# Altium PCB imx6_cpu_board.PcbDoc (part 3 of 9)
Units mil, origin at the board's own origin, x right, y up, seen from the top; angles counter-clockwise.
Board outline 2598.43 x 2362.2 mil, 8 copper layers (Top Layer, GND1, Signal Layer 1, POWER1, POWER2, Signal Layer 2, GND2, Bottom Layer), stack 66.304 mil thick; 354 components, 422 nets, 2180 pads, 1333 vias.
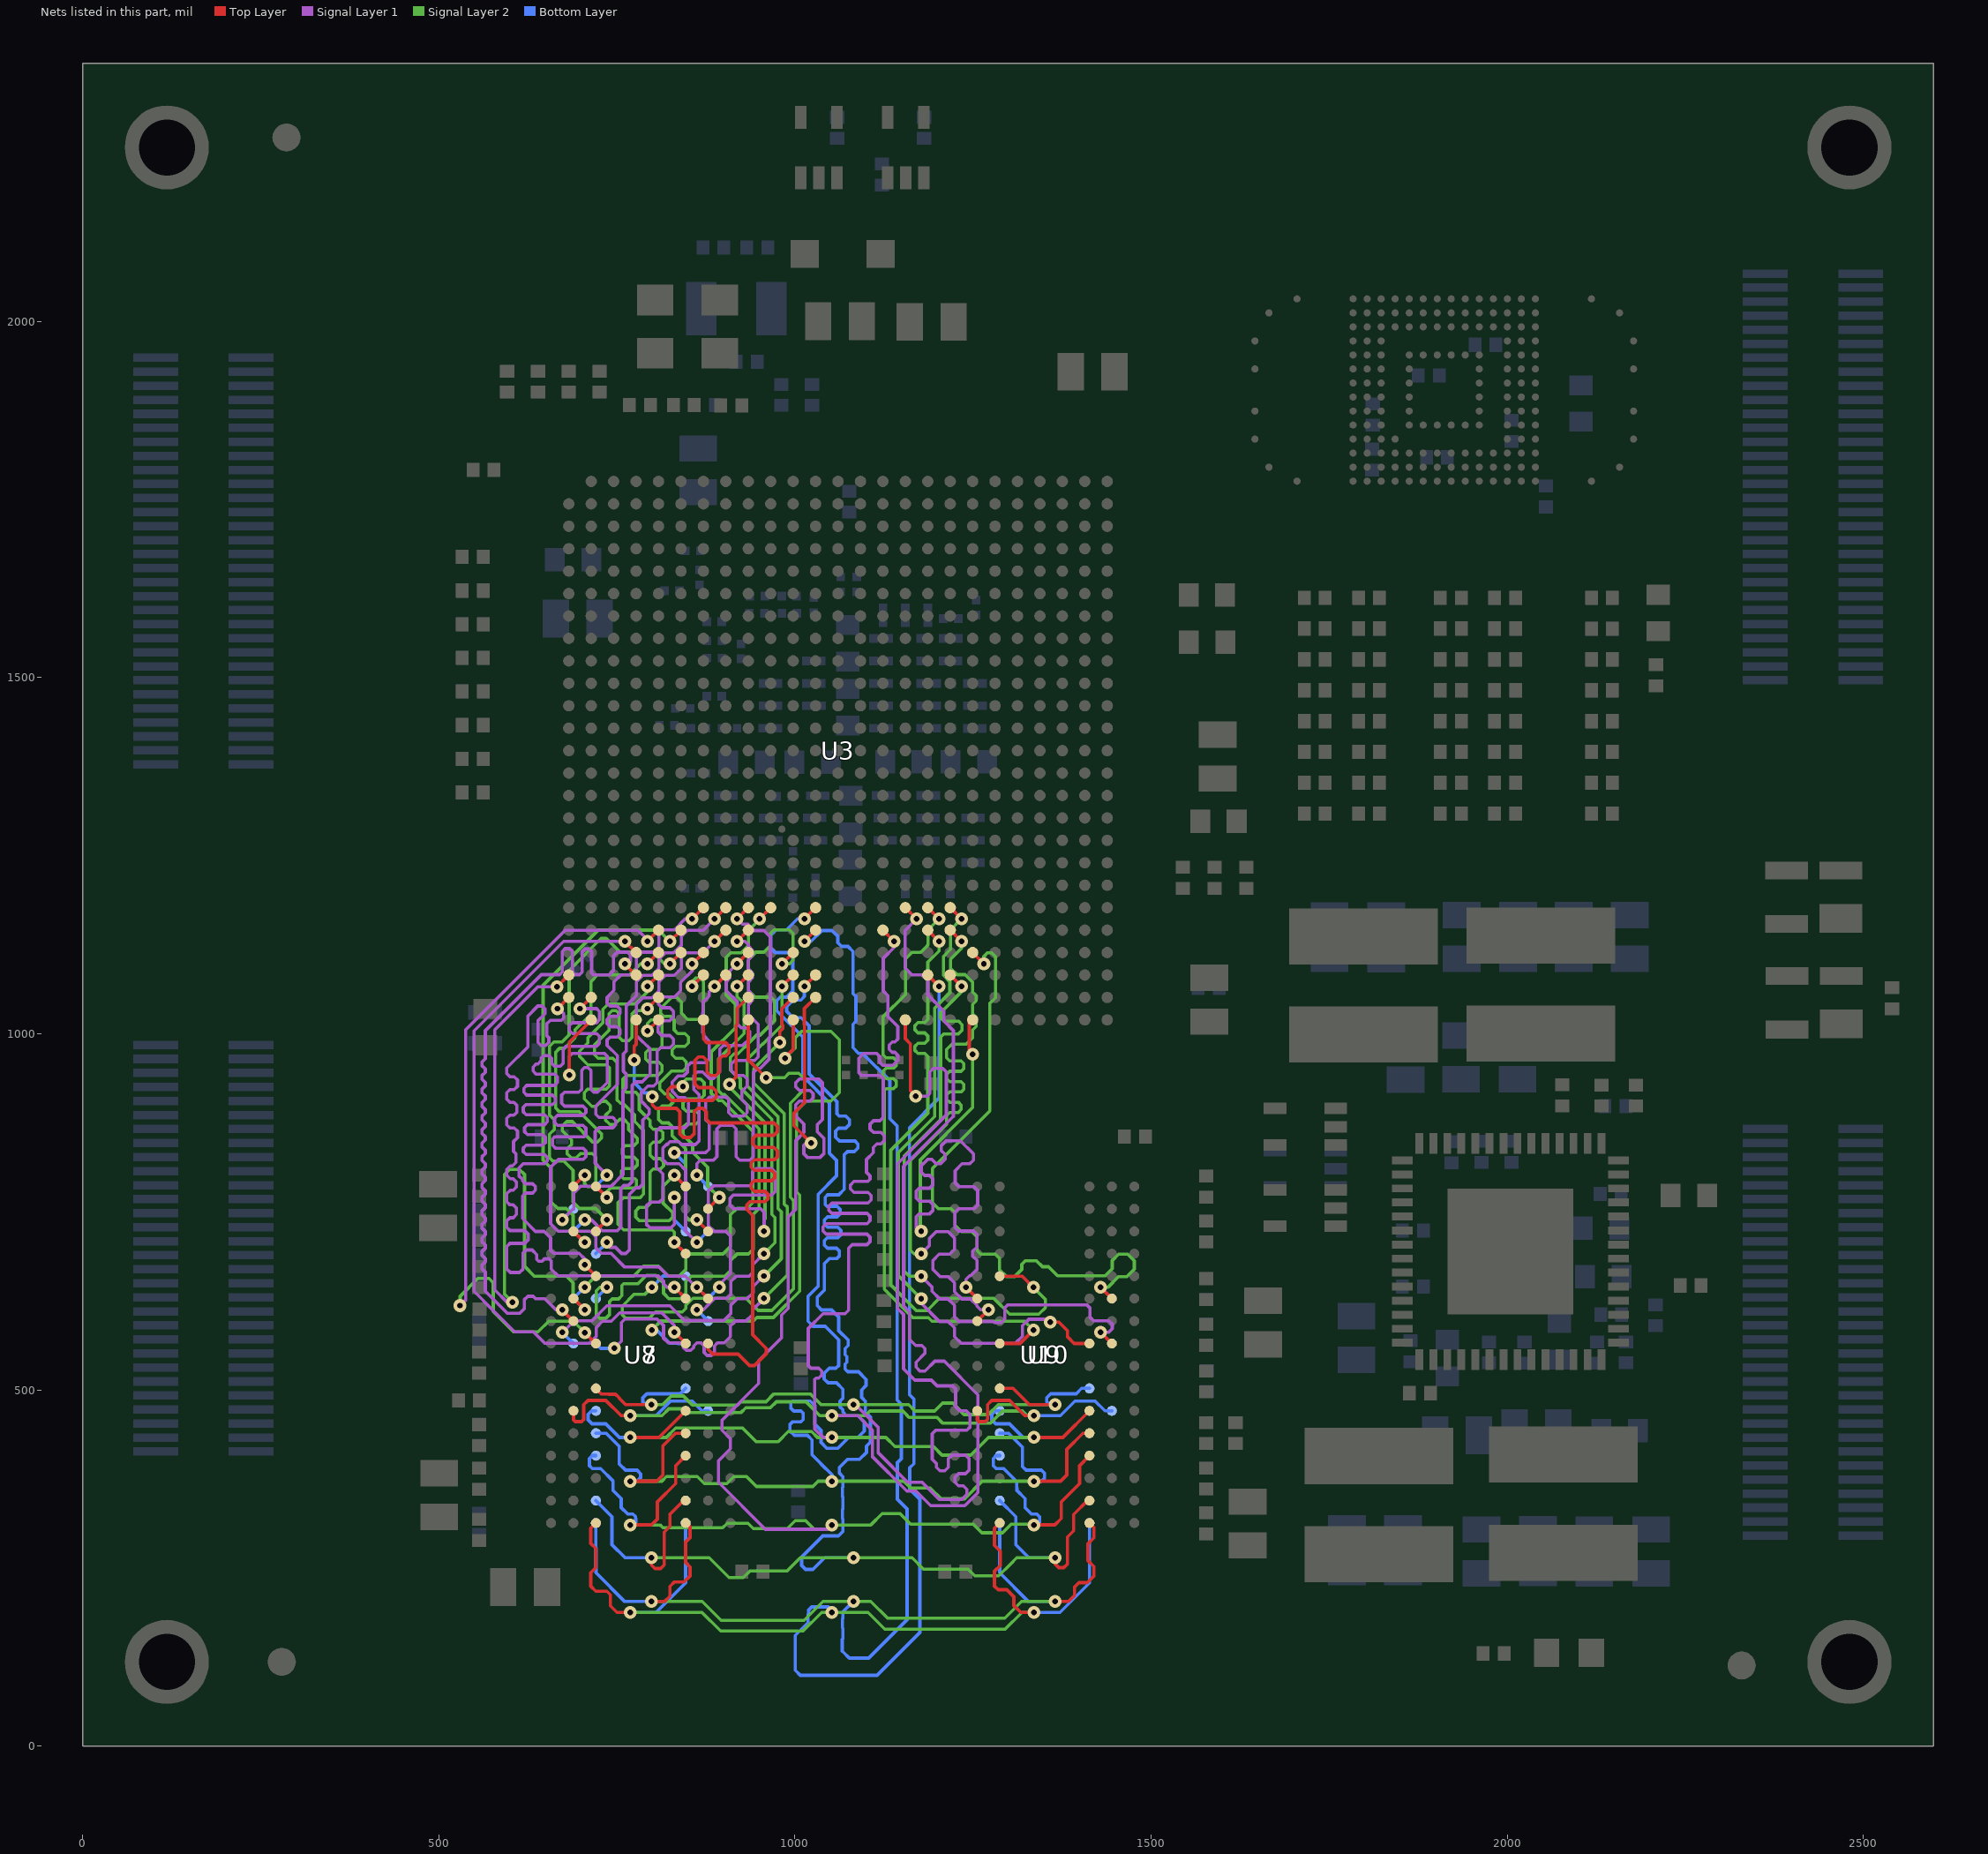
[diagram p9: the nets of this part, all layers, seen from the top]

## Via types
v1: diameter 18, hole 8, Top Layer to Bottom Layer, tented both sides, 768 vias
v2: diameter 20, hole 10, Top Layer to Bottom Layer, tented both sides, 565 vias

## Nets (pads, with @x,y where several pads share a name; then routed paths per layer and width w, separated by ;. In a path a pad name is that pad's centre, name@x,y a point inside that pad or via, vN(x,y) a via of type N, cw(c..) or ccw(c..) an arc to the next point about the centre after c; other vN are vias at no path point) (continued)
DRAM_A10: U3.AA15 U7.L7 U8.L7 U9.L7 U10.L7 | length 2253.2
  Top Layer w4.7: v1(768.45,433.19) 809.03,433.19 U8.L7@846.43,470.61 ; U3.AA15@1123.37,1145.37 v1(1139.12,1129.62) ; v1(1335.38,433.19) 1375.96,433.19 U10.L7@1413.36,470.61
  Signal Layer 1 w4.5: v1(1051.88,433.19) 1039.53,433.19 1027.38,445.34 1027.38,514.34 1029.38,516.34 1033.28,516.34 1037.38,520.44 1037.38,526.24 1033.28,530.34 1022.38,530.34 1018.63,534.09 1018.63,586.09 1039.38,606.84 1070.38,606.84 1075.38,611.84 1075.38,698.74 1080.38,703.74 1100.98,703.74 1105.38,708.14 1105.38,714.35 1100.98,718.75 1043.63,718.75 1039.38,723 1039.38,729.01 1043.63,733.25 1101.13,733.25 1105.38,737.5 1105.38,743.5 1101.13,747.75 1051.63,747.75 1047.38,752 1047.38,758.01 1051.63,762.25 1102.63,762.25 1106.88,766.5 1106.88,772.95 1102.62,777.21 1082.63,777.21 1077.63,782.21 1077.63,787.52 1082.81,792.71 1102.38,792.71 1105.38,795.71 1105.38,800.34 1100.38,805.34 1100.38,823.34 1109.87,832.83 1109.87,840.34 1114.87,845.34 1120.69,845.34 1125.38,850.03 1125.38,856.65 1120.69,861.34 1110.21,861.34 1105.38,866.17 1105.38,873 1110.21,877.83 1119.38,877.83 1123.88,882.32 1123.88,936.89 1119.63,941.14 1093.58,941.14 1089.38,945.34 1089.38,965.34 1096.38,972.34 1114.62,972.34 1118.87,968.09 1118.87,959.88 1123.12,955.64 1137.63,955.64 1144.38,962.38 1144.38,969.53 1140.13,973.77 1136.63,973.77 1132.38,978.02 1132.38,984.03 1136.63,988.27 1140.13,988.27 1144.38,992.52 1144.38,1010.1 1130.38,1024.1 1130.38,1053.34 1123.87,1059.85 1123.87,1105.82 1139.12,1121.09 v1(1139.12,1129.62)
  Signal Layer 2 w4.5: v1(768.45,433.19) 819.18,433.19 832.33,446.34 926.38,446.34 945.38,427.34 976.38,427.34 990.43,441.39 1023.33,441.39 1031.53,433.19 v1(1051.88,433.19) 1127.48,433.19 1140.33,420.34 1194.39,420.34 1206.39,408.34 1246.79,408.34 1271.64,433.19 v1(1335.38,433.19)
  Bottom Layer w4.7: U7.L7@720.46,470.61 714.45,470.6 709.45,465.6 709.45,457.93 714.93,452.45 734.18,452.46 753.45,433.19 v1(768.45,433.19) ; U9.L7@1287.39,470.61 1281.38,470.6 1276.38,465.6 1276.38,457.93 1281.85,452.46 1301.11,452.46 1320.38,433.19 v1(1335.38,433.19)
DRAM_A11: U3.AC12 U7.R7 U8.R7 U9.R7 U10.R7 | length 2437.5
  Top Layer w4.7: v1(798.45,264.34) 798.45,254.34 803.45,249.34 811.38,249.34 816.38,254.34 816.38,300.33 824.39,308.34 824.39,325.35 843.66,344.62 U8.R7@846.43,344.63 ; v1(1013.14,1066.63) U3.AC12@1028.88,1082.38 ; v1(1365.38,264.34) 1365.38,255.34 1370.38,250.34 1377.38,250.34 1382.38,255.34 1382.38,293.4 1391.13,302.15 1391.13,325.09 1410.66,344.62 U10.R7@1413.36,344.63
  Signal Layer 2 w4.5: v1(798.45,264.34) 879.38,264.34 907.38,236.34 927.38,236.34 936.88,245.84 988.88,245.84 1007.38,264.34 v1(1081.88,264.34) 1164.38,264.34 1180.38,248.34 1242.88,248.34 1252.33,238.89 1285.93,238.89 1302.88,255.84 1311.4,264.34 v1(1365.38,264.34)
  Bottom Layer w4.7: U7.R7@720.46,344.63 720.46,344.56 743.08,321.94 743.08,282.71 761.45,264.34 v1(798.45,264.34) ; v1(1013.14,1066.63) 1013.14,1052.1 1008.38,1047.34 997.38,1047.34 988.38,1038.34 988.38,1031.34 997.22,1022.5 1008.38,1022.5 1019.68,1011.2 1019.68,943.65 1058.68,904.65 1058.68,887.9 1062.34,884.24 1071.48,884.24 1076.38,879.34 1076.38,872.24 1071.38,867.24 1060.98,867.24 1057.08,863.34 1057.08,854.58 1062.38,849.28 1084.14,849.28 1088.31,845.1 1088.31,839.58 1083.31,834.58 1073.62,834.58 1069.08,830.04 1069.08,781.48 1061.38,773.78 1045.82,773.78 1042.38,770.34 1042.38,760.34 1045.03,757.69 1059.07,757.69 1063.38,753.38 1063.38,747.29 1059.07,742.99 1045.49,742.99 1041.18,738.68 1041.18,732.59 1045.49,728.29 1060.07,728.29 1064.38,723.98 1064.38,717.89 1060.07,713.59 1045.49,713.59 1041.18,709.28 1041.18,703.19 1045.49,698.89 1058.07,698.89 1062.38,694.58 1062.38,688.49 1058.07,684.19 1048.34,684.19 1041.18,677.03 1041.18,640.08 1031.34,630.24 1031.34,618.24 1037.34,612.24 1051.34,612.24 1061.38,602.2 1061.38,583.19 1074.66,569.9 1074.66,562.24 1070.34,557.92 1070.34,549.24 1072.84,546.74 1072.84,538.74 1070.34,536.24 1070.34,529.34 1074.34,525.34 1089.08,525.34 1099.87,514.54 1099.87,506.12 1093.38,499.63 1093.38,489.45 1098.89,483.94 1098.89,468.82 1105.93,461.79 1105.93,426.61 1100.28,420.96 1100.28,412.24 1090.53,402.49 1073.59,402.49 1062.38,391.28 1062.38,383 1067.23,378.15 1067.23,363.5 1066.53,362.8 1066.53,350.08 1067.23,349.38 1067.23,332.8 1066.53,332.1 1066.53,319.38 1067.23,318.68 1067.23,301.19 1061.08,295.04 1039.08,295.04 1009.38,265.34 1009.38,253.34 1014.7,248.02 1025.06,248.02 1041.38,264.34 v1(1081.88,264.34) ; U9.R7@1287.39,344.63 1287.39,344.56 1310.01,321.94 1310.01,282.71 1328.38,264.34 v1(1365.38,264.34)
DRAM_A12: U3.AD12 U7.N7 U8.N7 U9.N7 U10.N7 | length 2482
  Top Layer w4.7: v1(768.45,310.39) 798.5,310.39 806.8,318.69 806.8,342.69 832.45,368.34 832.45,393.62 U8.N7@846.43,407.62 ; v1(1022.78,846.39) 998.38,870.79 998.38,888.34 1013.38,903.34 1013.38,1012.62 1013.14,1012.86 1013.14,1035.14 U3.AD12@1028.88,1050.88 ; v1(1335.38,310.39) 1364.74,310.39 1373.73,319.39 1373.73,342.69 1399.38,368.34 1399.38,393.62 U10.N7@1413.36,407.62
  Signal Layer 1 w4.5: v1(1022.78,846.39) 1015.38,846.39 1012.38,843.39 1012.38,831.34 1017.38,826.34 1035.38,826.34 1040.38,831.34 1040.38,853.34 1031.38,862.34 1031.38,872.34 1038.38,879.34 1038.38,931.34 1033.38,936.34 1006.13,936.34 1001.13,931.34 1001.13,925.34 1006.13,920.34 1020.99,920.34 1025.38,915.95 1025.38,909.73 1020.99,905.34 1006.13,905.34 1001.13,900.34 1001.13,884.34 1012.38,873.09 1012.38,861.34 1001.13,850.09 1001.13,753.59 990.38,742.84 990.38,614.34 981.13,605.09 981.13,573.09 949.03,540.99 949.03,508.99 897.38,457.34 897.38,443.34 909.38,431.34 909.38,417.34 892.38,400.34 892.38,370.34 958.38,304.34 1045.83,304.34 v1(1051.88,310.39)
  Signal Layer 2 w4.5: v1(768.45,310.39) 810.38,310.39 814.43,306.34 898.33,306.34 904.83,312.84 933.88,312.84 941.6,305.12 989.15,305.12 1000.37,316.34 1014.83,316.34 1027.29,303.89 1045.38,303.89 v1(1051.88,310.39) 1106.43,310.39 1122.38,326.34 1147.38,326.34 1162.38,311.34 1250.36,311.34 1259.86,301.84 ; 1259.88,301.84 1262.38,299.34 1291.38,299.34 1303.38,311.34 1334.43,311.34 v1(1335.38,310.39)
  Bottom Layer w4.7: U7.N7@720.46,407.62 715.45,407.61 711.45,403.61 711.45,393.46 715.44,389.47 726,389.47 727.19,389.46 744.4,372.26 744.4,361.83 744.45,361.78 744.45,358.99 756.1,347.34 756.1,334.73 765.09,325.74 772.45,325.74 776.1,322.09 776.1,319.39 776.45,319.04 776.45,314.39 772.45,310.39 v1(768.45,310.39) ; U9.N7@1287.39,407.62 1282.38,407.61 1278.38,403.61 1278.38,393.46 1282.37,389.47 1292.92,389.47 1300.74,381.65 ; 1300.74,381.64 1311.33,371.05 1311.33,361.83 1311.38,361.78 1311.38,358.99 1323.03,347.34 1323.03,334.73 1332.02,325.74 1339.38,325.74 1343.38,321.74 1343.38,314.39 1339.38,310.39 v1(1335.38,310.39)
DRAM_A13: U3.AC17 U7.T3 U8.T3 U9.T3 U10.T3 | length 2612.4
  Top Layer w4.7: U8.T3@720.45,313.13 713.15,305.81 713.15,284.57 720.38,277.34 720.38,250.57 713.15,243.34 713.15,224.49 720.31,217.34 735.84,217.34 740.84,212.34 740.84,196.8 750.06,187.59 v1(768.45,187.59) ; U3.AC17@1186.36,1082.38 v1(1202.11,1066.63) ; U10.T3@1287.38,313.13 1280.08,305.81 1280.08,281.64 1288.38,273.34 1288.38,253.64 1280.08,245.34 1280.08,224.49 1285.23,219.34 1297.38,219.34 1307.31,209.41 1307.31,197.27 1316.98,187.59 v1(1335.38,187.59)
  Signal Layer 2 w4.5: v1(768.45,187.59) 869.38,187.59 895.58,161.39 1011.18,161.39 1037.38,187.59 v1(1051.88,187.59) 1102.38,187.59 1126.08,163.89 1294.93,163.89 1318.63,187.59 v1(1335.38,187.59)
  Bottom Layer w4.7: v1(768.45,187.59) 805.05,187.59 846.44,228.98 U7.T3@846.44,313.13 ; v1(1051.88,187.59) 1051.88,190.34 1046.88,195.34 1023.38,195.34 1019.08,191.04 1019.08,185.74 1018.38,185.04 1018.38,173.34 1000.38,155.34 1000.38,106.34 1007.38,99.34 1115.38,99.34 1175.38,159.34 1175.38,346.34 1161.18,360.54 1161.18,390.69 1166.83,396.34 1166.83,440.45 1166.84,487.05 1166.28,487.61 1160.77,493.11 1160.77,868.04 1202.11,909.38 v1(1202.11,1066.63) ; v1(1335.38,187.59) 1371.98,187.59 1413.37,228.98 U9.T3@1413.37,313.13
DRAM_A14: U3.AA12 U7.T7 U8.T7 U9.T7 U10.T7 | length 2546.5
  Top Layer w4.7: v1(798.45,202.94) 816.85,202.94 824.38,210.47 824.38,224.03 830.76,230.41 844.31,230.41 852.75,238.84 852.75,251.34 846.38,257.71 846.38,286.34 852.75,292.71 852.75,308.12 847.75,313.12 U8.T7@846.43,313.13 ; v1(1013.14,1129.62) U3.AA12@1028.88,1145.37 ; v1(1365.38,202.94) 1383.78,202.94 1392.28,211.44 1392.28,223.13 1398.59,229.44 1410.28,229.44 1419.68,238.84 1419.68,252.04 1411.38,260.34 1411.38,284.04 1419.68,292.34 1419.68,306.81 U10.T7@1413.36,313.13
  Signal Layer 2 w4.5: v1(798.45,202.94) 869.78,202.94 896.38,176.34 1012.78,176.34 1039.38,202.94 v1(1081.88,202.94) 1106.38,202.94 1129.98,179.34 1294.38,179.34 1317.98,202.94 v1(1365.38,202.94)
  Bottom Layer w4.7: U7.T7@720.46,313.13 720.46,277.7 720.57,277.59 720.57,243.22 760.85,202.94 v1(798.45,202.94) ; v1(1013.14,1129.62) 1022.66,1129.62 1038.01,1144.97 1051.75,1144.97 1059.98,1136.74 1059.98,1127.74 1065.38,1122.34 1074.38,1122.34 1081.38,1115.34 1081.38,1056.31 1085.38,1052.31 1085.38,1017.26 1081.38,1013.26 1081.38,980.34 1089.38,972.34 1094.78,972.34 1133.08,934.04 1133.08,880.64 1143.37,870.35 1143.37,485.89 1148.88,480.39 1149.44,479.83 1149.44,447.68 1149.43,403.55 1143.78,397.9 1143.78,346.34 1157.38,332.74 1157.38,177.34 1103.38,123.34 1076.38,123.34 1067.23,132.49 1067.23,132.55 1066.38,133.4 1066.38,149.68 1067.23,150.53 1067.23,165.18 1066.53,165.88 1066.53,178.6 1067.23,179.3 1067.23,188.29 v1(1081.88,202.94) ; U9.T7@1287.39,313.13 1287.39,277.7 1287.5,277.59 1287.5,243.22 1327.78,202.94 v1(1365.38,202.94)
DRAM_A15: U3.Y12 U7.M7 U8.M7 U9.M7 U10.M7 | length 2401.1
  Top Layer w4.7: v1(768.45,371.79) 805.9,371.79 814.45,380.34 814.45,421.47 832.08,439.1 U8.M7@846.43,439.11 ; v1(1013.14,1161.12) U3.Y12@1028.88,1176.87 ; v1(1335.38,371.79) 1372.83,371.79 1381.38,380.34 1381.38,416.34 1404.14,439.1 U10.M7@1413.36,439.11
  Signal Layer 2 w4.5: v1(768.45,371.79) 813.09,371.79 819.64,378.34 862.88,378.34 872.88,368.34 904.38,368.34 914.38,378.34 931.99,378.34 945.99,364.34 1024.93,364.34 1032.38,371.79 v1(1051.88,371.79) 1152.93,371.79 1162.38,362.34 1189.81,362.34 1205.06,347.09 1238.04,347.09 1262.74,371.79 v1(1335.38,371.79)
  Bottom Layer w4.7: U7.M7@720.46,439.11 734.82,439.1 753.1,420.82 753.1,396.13 762.09,387.14 778.38,387.14 783.38,382.14 783.38,376.79 778.38,371.79 v1(768.45,371.79) ; v1(1013.14,1161.12) 1003.35,1161.12 988,1145.77 973.38,1145.77 966.03,1138.42 966.03,1120.19 972.33,1113.89 990.01,1113.89 996.99,1106.91 996.99,1059.93 988.34,1051.28 979.32,1051.28 974.38,1046.34 974.38,1031.89 1010.98,995.29 1010.98,940.04 1048.38,902.64 1048.38,832.2 1058.34,822.24 1058.34,800.34 1032.48,774.48 1032.48,645.38 1018.34,631.25 1018.34,596.24 1025.34,589.24 1042.34,589.24 1061.34,570.24 1061.34,534.24 1057.34,530.24 1048.02,530.24 1041.02,523.24 1041.02,515.24 1046.32,509.94 1058.24,509.94 1067.23,500.95 1067.23,488.24 1063.34,484.35 1063.34,476.07 1067.23,472.18 1067.23,468.89 1072.23,463.89 1088.24,463.89 1097.23,454.9 1097.23,442.19 1088.24,433.19 1075.23,433.19 1059.88,417.84 1044.88,417.84 1036.53,426.19 1036.53,443.19 1027.83,451.89 1027.83,477.75 1021.34,484.24 997.02,484.24 994.02,481.24 994.02,474.57 998.34,470.24 1008.38,470.24 1011.38,467.24 1011.38,458.28 1008.34,455.24 996.78,455.24 992.78,451.24 992.78,442.55 999.09,436.24 1017.34,436.24 1023.78,429.8 1023.78,408.94 1036.53,396.19 1036.53,396.13 1051.88,380.78 v1(1051.88,371.79) ; U9.M7@1287.39,439.11 1299.62,439.1 1319.38,419.34 1319.38,392.14 1324.38,387.14 1345.88,387.14 1350.38,382.64 1350.38,376.29 1345.88,371.79 v1(1335.38,371.79)
DRAM_CAS_B: U3.AE16 U7.K3 U8.K3 U9.K3 U10.K3 | length 2234
  Top Layer w4.7: U8.K3@720.45,502.11 728.52,494.04 738.06,494.04 738.22,493.88 748.1,493.88 753.1,488.88 753.1,488.18 762.04,479.24 v1(798.45,479.24) ; U3.AE16@1154.87,1019.39 1154.87,992.85 1161.92,985.8 1161.92,919.8 v1(1169.38,912.34) ; U10.K3@1287.38,502.11 1306.11,502.1 1328.97,479.24 v1(1365.38,479.24)
  Signal Layer 1 w4.5: v1(1081.88,479.24) 1084.77,479.24 1116.95,447.06 1116.95,411.39 1158,370.34 1178.38,370.34 1202.38,346.34 1234.38,346.34 1241.38,353.34 1241.38,360.34 1236.38,365.34 1229.38,365.34 1224.38,370.34 1224.38,377.34 1229.38,382.34 1239.38,382.34 1244.38,387.34 1244.38,403.34 1239.38,408.34 1220.38,408.34 1215.38,403.34 1215.38,391.34 1210.38,386.34 1203.63,386.34 1198.63,391.34 1198.63,396.59 1192.63,402.59 1192.63,438.34 1197.63,443.34 1241.38,443.34 1245.38,447.34 1245.38,465.55 1240.09,470.84 1230.91,470.84 1225.38,476.37 1225.38,501.34 1221.13,505.59 1199.33,505.59 1191.33,513.59 1168.19,513.59 1152.37,529.41 1152.37,605.87 1143.87,614.37 1143.87,817.37 1212.39,885.89 1212.39,892.93 1212.38,946.34 1207.38,951.34 1194.38,951.34 1189.38,946.34 1189.38,916.34 1185.38,912.34 v1(1169.38,912.34)
  Signal Layer 2 w4.5: v1(798.45,479.24) 814.28,479.24 826.38,491.34 843.38,491.34 855.83,478.89 919.66,478.89 924.11,483.34 959.38,483.34 970.38,494.34 1021.38,494.34 1036.48,479.24 v1(1081.88,479.24) 1159.48,479.24 1168.38,470.34 1196.14,470.34 1207.18,481.39 1221.28,481.39 1237.33,465.34 1271.38,465.34 1285.31,479.27 ; 1285.31,479.3 1285.34,479.34 v1(1365.38,479.24)
  Bottom Layer w4.7: v1(798.45,479.24) 790.45,479.24 786.45,483.24 786.45,488.95 792.09,494.59 838.94,494.59 U7.K3@846.44,502.11 ; v1(1365.38,479.24) 1357.38,479.24 1353.38,483.24 1353.38,488.95 1359.02,494.59 1394.83,494.59 1402.33,502.1 U9.K3@1413.37,502.11
DRAM_CS0_B: U3.Y16 U7.L2 U8.L2 U9.L2 U10.L2 | length 2393
  Top Layer w4.7: U8.L2@688.95,470.61 688.96,457.83 691.45,455.34 700.45,455.34 703.45,458.34 703.45,479.34 709.45,485.34 734.45,485.34 755.9,463.89 v1(768.45,463.89) ; U3.Y16@1154.87,1176.87 v1(1170.62,1161.12) ; U10.L2@1255.88,470.61 1255.89,457.83 1258.38,455.34 1267.38,455.34 1270.38,458.34 1270.38,479.34 1276.38,485.34 1301.38,485.34 1322.83,463.89 v1(1335.38,463.89)
  Signal Layer 1 w4.5: v1(1051.88,463.89) 1051.98,463.79 1088.19,463.79 1108.5,443.48 1108.5,406.5 1157.16,357.84 1169.88,357.84 1190.38,337.34 1238.38,337.34 1256.88,355.84 1256.88,493.01 1209.55,540.34 1196.38,540.34 1182.42,526.38 1175.34,526.38 1169.92,531.8 1169.92,538.88 1182.38,551.34 1182.38,557.95 1177.99,562.34 1169.38,562.34 1160.87,570.85 1160.87,609.4 1152.37,617.9 1152.37,813.84 1220.89,882.36 1222.38,883.87 1222.38,1004.32 1208.88,1017.82 1208.88,1031.86 1186.38,1054.36 1186.38,1074.34 1178.38,1082.34 1164.38,1082.34 1154.38,1092.34 1154.38,1144.88 v1(1170.62,1161.12)
  Signal Layer 2 w4.5: v1(768.45,463.89) 813.43,463.89 822.88,473.34 847.38,473.34 852.38,468.34 924.38,468.34 930.88,474.84 965.38,474.84 973.88,483.34 1015.38,483.34 1034.83,463.89 v1(1051.88,463.89) 1098.38,463.89 1104.83,470.34 1151.38,470.34 1157.38,464.34 1157.38,463.89 1159.93,461.34 1199.38,461.34 1207.63,453.09 1274.04,453.09 1291.29,470.34 1319.38,470.34 1325.83,463.89 v1(1335.38,463.89)
  Bottom Layer w4.7: v1(768.45,463.89) 804.81,463.89 825.26,484.34 855.64,484.34 869.38,470.6 U7.L2@877.94,470.61 ; v1(1335.38,463.89) 1372.48,463.89 1392.93,484.34 1421.38,484.34 1435.12,470.6 U9.L2@1444.87,470.61
DRAM_D0: U3.AD2 U8.E3 | length 1023.6
  Top Layer w4.7: v1(698.17,1035.14) U3.AD2@713.92,1050.88 ; v1(704.63,675.58) 720.46,659.75 U8.E3@720.45,659.59
  Signal Layer 1 w4.5: v1(698.17,1035.14) 721.38,1035.14 725.38,1031.14 725.38,1019.34 721.38,1015.34 687.38,1015.34 683.38,1011.34 683.38,1004.34 687.38,1000.34 721.38,1000.34 725.38,996.34 725.38,986.34 721.38,982.34 678.38,982.34 674.38,978.34 674.38,958.34 670.38,954.34 662.38,954.34 658.38,958.34 658.38,965.34 654.38,969.34 647.38,969.34 643.38,965.34 643.38,961.34 639.38,957.34 636.43,957.34 632.33,953.24 632.33,947.44 636.43,943.34 662.38,943.34 666.38,939.34 666.38,931.34 662.38,927.34 623.34,927.34 619.38,923.38 619.38,917.77 623.34,913.81 659.43,913.81 663.38,909.86 663.38,904.26 659.43,900.31 622.11,900.31 618.41,896.61 618.41,890.34 622.41,886.34 648.38,886.34 652.38,882.34 652.38,876.34 648.38,872.34 624.38,872.34 620.38,868.34 620.38,862.34 624.38,858.34 645.38,858.34 649.38,854.34 649.38,847.34 645.38,843.34 622.41,843.34 618.41,839.34 618.41,834.34 622.41,830.34 648.38,830.34 652.38,826.34 652.38,821.34 648.38,817.34 618.4,817.34 612.38,811.32 612.38,800.36 617.39,795.35 617.39,793.34 621.39,789.34 631.57,789.34 635.38,785.53 635.38,780.15 631.57,776.34 621.39,776.34 617.39,772.34 617.39,740.59 635.66,722.32 647.97,722.32 656.91,713.39 656.91,695.82 660.91,691.82 696.9,691.82 704.63,684.09 v1(704.63,675.58)
DRAM_D1: U3.AE2 U8.F8 | length 1029
  Top Layer w4.7: v1(683.13,941.99) 683.13,987.99 713.92,1018.78 U3.AE2@713.92,1019.39 ; v1(862.13,644.08) 877.94,628.27 U8.F8@877.93,628.09
  Signal Layer 1 w4.5: v1(683.13,941.99) 683.13,968.34 687.13,972.34 732.38,972.34 736.38,968.34 736.38,931.43 722.83,917.88 717.38,917.88 713.38,921.88 713.38,948.34 709.38,952.34 704.38,952.34 700.38,948.34 700.38,921.88 696.38,917.88 676.38,917.88 672.38,913.88 672.38,902.34 676.38,898.34 702.38,898.34 706.38,894.34 706.38,889.34 702.38,885.34 666.42,885.34 662.42,881.34 662.42,875.34 666.42,871.34 702.38,871.34 706.38,867.34 706.38,857.81 703.6,855.02 662.42,855.02 659.64,852.24 659.64,843.34 663.64,839.34 702.38,839.34 706.38,835.34 706.38,827.43 702.38,823.43 667.98,823.43 656.89,812.34 656.89,733.26 657.89,732.27 667.54,722.59 712.39,722.59 720.39,714.59 720.39,699.59 728.39,691.59 741.68,691.59 760.93,672.34 809.6,672.34 814.87,667.08 ; 814.9,667.08 822.39,659.59 846.13,659.59 861.64,644.08 v1(862.13,644.08)
DRAM_D2: U3.AC4 U8.G2 | length 1029.7
  Top Layer w4.7: v1(673.18,612.34) 673.18,612.04 688.63,596.58 U8.G2@688.95,596.59 ; v1(761.17,1097.75) 776.54,1082.38 U3.AC4@776.92,1082.38
  Signal Layer 1 w4.5: v1(673.18,612.34) 664.38,612.34 648.89,627.83 635.89,627.83 632.33,631.39 624.83,631.39 619.83,626.39 619.83,613.7 613.47,607.34 596.16,607.34 565.18,638.32 565.18,665.45 560.38,670.25 560.38,674.95 565.18,679.75 565.18,684.45 560.38,689.25 560.38,693.95 565.18,698.75 565.18,703.45 560.38,708.25 560.38,712.95 565.18,717.75 565.18,722.45 560.38,727.25 560.38,731.95 565.18,736.75 565.18,741.45 560.38,746.25 560.38,750.95 565.18,755.75 565.18,760.45 560.38,765.25 560.38,769.95 565.18,774.75 565.18,779.45 560.38,784.25 560.38,788.95 565.18,793.75 565.18,798.45 560.38,803.25 560.38,807.95 565.18,812.75 565.18,817.45 560.38,822.25 560.38,826.95 565.18,831.75 565.18,836.45 560.38,841.25 560.38,845.95 565.18,850.75 565.18,855.45 560.38,860.25 560.38,864.95 565.18,869.75 565.18,874.45 560.38,879.25 560.38,883.95 565.18,888.75 565.18,893.45 560.38,898.25 560.38,902.95 565.18,907.75 565.18,912.45 560.38,917.25 560.38,921.95 565.18,926.75 565.18,931.45 560.38,936.25 560.38,940.95 565.18,945.75 565.18,950.45 560.38,955.25 560.38,959.95 565.18,964.75 565.18,1004.17 643.89,1082.88 669.38,1082.88 673.38,1086.88 673.38,1115.34 677.38,1119.34 683.38,1119.34 687.38,1115.34 687.38,1086.88 691.38,1082.88 697.38,1082.88 701.38,1086.88 701.38,1115.07 705.2,1118.89 710.6,1118.89 714.42,1115.07 714.42,1085.3 717.38,1082.34 738.91,1082.34 744.92,1088.35 744.92,1108.93 750.38,1114.39 765.38,1114.39 768.91,1110.86 768.91,1101.28 765.38,1097.75 v1(761.17,1097.75)
DRAM_D3: U3.AA5 U8.H3 | length 1021.2
  Top Layer w4.7: v1(704.73,580.44) 720.08,565.09 U8.H3@720.45,565.1 ; v1(792.66,1129.62) U3.AA5@808.41,1145.37
  Signal Layer 1 w4.5: v1(529.88,618.34) 537.88,626.34 537.88,1005.84 676.93,1144.89 779.83,1144.89 792.66,1132.06 v1(792.66,1129.62)
  Signal Layer 2 w4.5: v1(529.88,618.34) 529.88,631.43 554.79,656.34 570.38,656.34 576.38,650.34 576.38,609.84 604.88,581.34 617.96,581.34 639.37,581.33 654.38,596.34 688.83,596.34 v1(704.73,580.44)
DRAM_D4: U3.AC1 U8.F2 | length 1023.6
  Top Layer w4.7: v1(665.89,1065.84) U3.AC1@682.43,1082.38 ; U8.F2@688.95,628.09 689.14,628.08 v1(704.63,612.58)
  Signal Layer 1 w4.5: v1(603.28,623.19) 595.53,623.19 578.39,640.33 578.39,1005.35 638.88,1065.84 v1(665.89,1065.84)
  Signal Layer 2 w4.5: v1(603.28,623.19) 592.38,634.09 592.38,802.34 599.38,809.34 613.38,809.34 620.38,802.34 620.38,673.34 634.39,659.33 679.45,659.33 688.39,650.4 688.39,628.83 v1(704.63,612.58)
DRAM_D5: U3.AD1 U8.F7 | length 1025.2
  Top Layer w4.7: v1(666.68,1035.14) U3.AD1@682.43,1050.88 ; v1(830.63,644.08) 846.44,628.27 U8.F7@846.43,628.09
  Signal Layer 1 w4.5: v1(666.68,1035.14) 668.36,1035.14 675.38,1028.12 675.38,1022.34 671.93,1018.89 656.43,1018.89 651.43,1013.89 651.43,997.32 654.38,994.37 654.38,987.75 649.97,983.34 643.74,983.34 639.34,987.75 639.34,1018.39 649.15,1028.2 649.15,1034.57 644.83,1038.89 638.96,1038.89 624.83,1024.76 624.83,981.39 595.39,951.94 595.39,944.13 599.89,939.63 605.88,939.63 610.38,935.13 610.38,926.13 605.88,921.63 599.89,921.63 595.39,917.13 595.39,908.13 599.89,903.63 605.38,903.63 609.38,899.63 609.38,889.63 605.38,885.63 599.89,885.63 595.39,881.13 595.39,872.13 599.89,867.63 605.88,867.63 610.38,863.13 610.38,854.13 604.89,848.64 604.89,834.83 608.38,831.34 608.38,819.35 603.37,814.34 600.38,814.34 595.39,809.35 595.39,801.33 600.38,796.34 604.37,796.34 608.89,791.82 608.89,784.84 604.38,780.33 600.39,780.33 595.39,775.33 595.39,764.13 599.89,759.63 604.38,759.63 608.89,755.13 608.89,746.14 604.38,741.63 599.89,741.63 595.39,737.13 595.39,728.13 599.89,723.63 620.38,723.63 625.38,718.63 625.38,710.63 620.38,705.63 599.89,705.63 595.39,701.13 595.39,669.84 600.39,664.84 613.38,664.84 618.38,669.84 618.38,692.34 622.38,696.34 630.8,696.34 637.38,689.76 637.38,683.34 640.02,680.7 645.02,680.7 648.34,684.02 654.7,684.02 657.89,680.83 657.89,669.26 666.82,660.33 807.39,660.33 815.38,652.34 815.38,649.08 820.38,644.08 v1(830.63,644.08)
DRAM_D6: U3.AB4 U8.H7 | length 1027.5
  Top Layer w4.7: v1(761.13,1129.64) U3.AB4@776.9,1113.88 ; v1(830.63,581.09) 846.44,565.28 U8.H7@846.43,565.1
  Signal Layer 1 w4.5: v1(761.13,1129.64) 675.08,1129.64 549.38,1003.94 549.38,638.41 563.13,624.66 563.13,624.59 606.38,581.34 617.96,581.34 630.6,581.33 632.83,581.34 648.98,565.19 711.05,565.19 720.88,575.02 720.88,587.41 729.81,596.34 742.19,596.34 753.95,608.09 812.91,608.09 830.63,590.37 v1(830.63,581.09)
DRAM_D7: U3.AE4 U8.H8 | length 1025.7
  Top Layer w4.7: v1(774.38,963.19) 774.38,982.39 776.92,984.92 U3.AE4@776.92,1019.39 ; v1(799.63,911.34) 799.63,900.34 804.63,895.34 833.38,895.34 838.38,890.34 838.38,859.34 843.38,854.34 853.38,854.34 858.38,859.34 858.38,890.34 863.38,895.34 870.38,895.34 875.38,890.34 875.38,879.79 880.38,874.79 970.38,874.79 975.38,869.79 975.38,862.34 970.38,857.34 945.38,857.34 940.38,852.34 940.38,845.34 945.38,840.34 970.38,840.34 975.38,835.34 975.38,827.22 971.07,822.91 942.69,822.91 938.38,818.61 938.38,812.52 942.69,808.21 967.07,808.21 971.38,803.91 971.38,797.82 967.07,793.51 942.69,793.51 938.38,789.21 938.38,783.12 942.69,778.81 958.07,778.81 962.38,774.51 962.38,768.42 958.07,764.11 936.69,764.11 932.38,759.81 932.38,753.02 940.47,744.93 940.47,577.25 959.84,557.88 959.84,550.8 943.11,534.08 936.04,534.08 920.08,550.04 884.64,550.04 877.94,556.74 U8.H8@877.93,565.1
  Bottom Layer w4.7: v1(774.38,963.19) 774.38,930.99 788.58,916.79 794.18,916.79 v1(799.63,911.34)
DRAM_D8: U3.AD5 U8.D7 | length 648.9
  Top Layer w4.7: v1(792.66,1035.14) U3.AD5@808.41,1050.88 ; v1(830.63,707.07) 846.44,691.26 U8.D7@846.43,691.08
  Signal Layer 2 w4.5: v1(792.66,1035.14) 789.87,1032.34 775.76,1032.34 771.26,1027.84 771.26,994.84 766.76,990.34 757.76,990.34 753.26,994.84 753.26,1027.84 748.76,1032.34 743.38,1032.34 738.92,1027.88 738.92,1004.88 718.38,984.34 718.38,970.34 723.38,965.34 744.3,965.34 749.88,959.76 749.88,907.32 754.88,902.32 758.4,902.32 774.87,885.85 774.87,876.85 787.39,864.33 787.39,774.59 782.39,769.59 758.39,769.59 751.39,762.59 751.39,732.59 759.39,724.59 827.38,724.59 830.63,721.34 v1(830.63,707.07)
DRAM_D9: U3.AE5 U8.A7 | length 653.8
  Top Layer w4.7: v1(792.66,1003.64) U3.AE5@808.41,1019.39 ; v1(830.63,801.56) 846.44,785.75 U8.A7@846.43,785.57
  Signal Layer 2 w4.5: v1(792.66,1003.64) 792.66,1014.34 797.66,1019.34 808.37,1019.34 813.38,1014.33 813.38,982.48 808.88,977.98 794.88,977.98 790.38,973.48 790.38,964.48 794.88,959.98 808.88,959.98 813.38,955.48 813.38,947.34 807.38,941.34 763.38,941.34 758.38,936.34 758.38,922.65 763.38,917.65 776.39,917.65 781.39,912.65 781.39,893.26 796.39,878.26 796.39,870.32 800.89,865.82 809.88,865.82 814.38,861.32 814.38,852.32 809.88,847.82 800.89,847.82 796.39,843.32 796.39,829.59 801.47,824.51 811.14,824.51 815.39,820.26 815.39,814.26 811.14,810.01 800.81,810.01 796.39,805.59 796.39,761.34 791.39,756.34 781.38,756.34 776.38,751.34 776.38,742.59 781.38,737.59 823.39,737.59 828.39,742.59 828.39,748.59 814.89,762.09 814.89,785.82 v1(830.63,801.56)
DRAM_D10: U3.AA6 U8.C2 | length 652.7
  Top Layer w4.7: U8.C2@688.95,722.58 689.14,722.57 v1(704.63,707.07) ; v1(824.16,1129.62) 839.91,1144.87 U3.AA6@839.91,1145.37
  Signal Layer 2 w4.5: 666.82,754.81 657.89,763.75 657.48,764.17 657.48,811.24 646.39,822.33 646.39,1067.91 723.82,1145.34 808.44,1145.34 v1(824.16,1129.62) ; 666.83,754.81 667.06,754.59 678.7,754.59 688.4,744.89 688.4,723.3 v1(704.63,707.07)
DRAM_D11: U3.AE7 U8.B8 | length 653.7
  Top Layer w4.7: v1(842.67,925.64) 826.38,925.64 821.38,920.64 821.38,911.34 826.38,906.34 884.38,906.34 889.38,911.34 889.38,919.34 884.38,924.34 864.38,924.34 859.38,929.34 859.38,962.42 864.34,967.39 871.37,967.39 876.33,962.42 876.33,946.34 881.33,941.34 888.76,941.34 893.46,946.04 893.46,963.84 898.16,968.54 902.68,968.54 907.38,973.24 907.38,982.64 902.68,987.34 876.1,987.34 871.4,992.04 U3.AE7@871.4,1019.39 ; U8.B8@877.93,754.07 877.94,754.38 v1(893.62,770.06)
  Signal Layer 2 w4.5: v1(842.67,925.64) 842.67,931.34 847.67,936.34 867.38,936.34 872.38,931.34 872.38,913.34 867.38,908.34 847.67,908.34 842.67,903.34 842.67,895.68 847.17,891.18 860.88,891.18 865.38,886.68 865.38,877.68 860.88,873.18 847.17,873.18 842.67,868.68 842.67,858.05 856.39,844.33 856.39,833.59 877.39,812.59 877.39,786.3 v1(893.62,770.06)
DRAM_D12: U3.AB5 U8.A2 | length 656.1
  Top Layer w4.7: U8.A2@688.95,785.57 688.96,785.89 v1(704.63,801.56) ; v1(792.66,1098.13) U3.AB5@808.41,1113.88
  Signal Layer 2 w4.5: v1(704.63,801.56) 704.65,789.33 708.67,785.31 715.38,785.31 720.38,790.31 720.38,826.72 715.38,831.72 698.9,831.72 692.63,825.45 686.27,825.45 679.9,831.82 679.9,838.18 686.17,844.45 686.17,850.81 673.39,863.59 673.39,870.59 679.39,876.59 687.39,876.59 716.39,847.59 722.39,847.59 728.39,853.59 728.39,859.33 697.38,890.34 669.38,890.34 663.88,895.84 663.88,973.84 669.38,979.34 676.35,979.34 691.42,994.41 691.42,1005.38 713.42,1027.38 713.42,1072.95 722.97,1082.5 767.49,1082.5 783.12,1098.13 v1(792.66,1098.13)
DRAM_D13: U3.AC5 U8.A3 | length 648.4
  Top Layer w4.7: U8.A3@720.45,785.57 720.63,785.56 v1(736.13,770.06) ; v1(792.66,1066.63) U3.AC5@808.41,1082.38
  Signal Layer 2 w4.5: v1(736.13,770.06) 736.13,778.34 741.13,783.34 774.38,783.34 777.38,786.34 777.38,794.34 775.38,796.34 759.38,796.34 756.38,799.34 756.38,807.34 759.88,810.84 773.88,810.84 778.38,815.34 778.38,822.34 773.88,826.84 761.88,826.84 757.38,831.34 757.38,838.34 761.88,842.84 773.88,842.84 778.38,847.34 778.38,853.34 766.37,865.35 766.37,873.35 760.01,879.71 753.64,879.71 746.51,872.58 740.14,872.58 733.78,878.94 733.78,885.3 740.92,892.44 740.92,898.8 734.55,905.17 728.19,905.17 721.05,898.03 714.69,898.03 704.38,908.34 704.38,917.34 709.38,922.34 735.38,922.34 739.38,926.34 739.38,952.34 735.38,956.34 709.38,956.34 697.38,968.34 697.38,975.34 709.38,987.34 709.38,994.34 730.42,1015.38 730.42,1034.38 737.88,1041.84 775.88,1041.84 792.66,1058.62 v1(792.66,1066.63)
DRAM_D14: U3.AB6 U8.C3 | length 649.6
  Top Layer w4.7: U8.C3@720.45,722.58 720.46,722.9 v1(736.13,738.57) ; v1(824.16,1098.13) U3.AB6@839.91,1113.88
  Signal Layer 2 w4.5: 681.93,997.32 673,988.39 661.43,988.39 655.38,982.34 655.38,885.84 662.33,878.89 662.33,865.84 655.38,858.89 655.38,825.84 659.83,821.39 675.33,821.39 688.33,808.39 688.33,807.93 688.39,807.88 688.39,763.59 697.39,754.59 698.41,754.59 698.46,754.54 711.1,754.54 711.15,754.59 720.1,754.59 v1(736.13,738.57) ; 681.93,997.35 682.92,998.34 682.92,1088.88 727.93,1133.89 734.83,1133.89 754.35,1114.37 800.35,1114.37 816.59,1098.13 v1(824.16,1098.13)
DRAM_D15: U3.AC7 U8.C8 | length 649.9
  Top Layer w4.7: v1(855.66,1066.63) U3.AC7@871.4,1082.38 ; v1(862.13,738.57) 877.94,722.76 U8.C8@877.93,722.58
  Signal Layer 2 w4.5: v1(855.66,1066.63) 855.66,1072.88 860.66,1077.88 866.98,1077.88 871.38,1073.48 871.38,1024.88 866.38,1019.88 849.34,1019.88 840.38,1028.84 840.38,1044.38 833.92,1050.84 826.84,1050.84 811.41,1035.41 811.41,1028.34 815.4,1024.34 825.38,1024.34 830.38,1019.34 830.38,1005.34 835.38,1000.34 845.38,1000.34 850.38,995.34 850.38,987.34 845.38,982.34 832.38,982.34 827.38,977.34 827.38,970.34 832.38,965.34 842.38,965.34 847.38,960.34 847.38,952.34 842.38,947.34 826.4,947.34 810.38,931.32 810.38,922.16 817.38,915.16 823.45,915.16 828.38,910.23 828.38,903.27 823.45,898.34 813.38,898.34 808.38,893.34 808.38,879.71 813.38,874.71 822.38,874.71 827.38,869.71 827.38,856.84 835.91,848.31 836.95,848.31 845.88,839.38 845.88,838.34 846.39,837.83 846.39,743.57 851.39,738.57 v1(862.13,738.57)
DRAM_D16: U3.AB7 U7.D7 | length 612
  Top Layer w4.7: v1(855.66,1098.13) 871.4,1113.36 U3.AB7@871.4,1113.88
  Signal Layer 1 w4.5: v1(736.13,707.07) 736.13,704.34 740.38,700.09 747.91,700.09 756.66,691.34 762.38,691.34 767.38,696.34 767.38,774.34 776.78,783.74 781.38,783.74 786.38,788.74 786.38,878.87 795.38,887.87 795.38,894.02 784.38,905.02 784.38,917.66 793.31,926.59 801.38,926.59 806.38,931.59 806.38,975.34 811.38,980.34 824.38,980.34 829.38,985.34 829.38,992.34 824.38,997.34 812.91,997.34 807.91,1002.34 807.91,1009.96 816.3,1018.34 824.38,1018.34 829.38,1023.34 829.38,1031.34 824.38,1036.34 813.38,1036.34 808.38,1041.34 808.38,1046.38 813.38,1051.38 830.48,1051.38 839.41,1060.31 839.41,1071.95 855.66,1088.2 v1(855.66,1098.13)
  Bottom Layer w4.7: U7.D7@720.46,691.08 720.46,691.24 720.38,691.32 v1(736.13,707.07)
DRAM_D17: U3.AA8 U7.C8 | length 613.7
  Top Layer w4.7: v1(887.15,1129.62) U3.AA8@902.9,1145.37
  Signal Layer 1 w4.5: v1(704.63,738.57) 714.56,738.57 729.81,723.32 750.38,723.32 755.38,728.32 755.38,782.31 760.38,787.31 766.41,787.31 771.41,792.31 771.41,927.34 776.41,932.34 785.38,932.34 796.38,943.34 796.38,978.72 786.72,988.39 786.34,988.39 777.41,997.32 777.41,1041.46 786.34,1050.39 799,1050.39 808.91,1060.31 808.91,1072.95 817.84,1081.88 830.48,1081.88 840.41,1091.81 840.41,1107.34 846.44,1113.38 870.91,1113.38 v1(887.15,1129.62)
  Bottom Layer w4.7: U7.C8@688.96,722.58 688.96,722.9 v1(704.63,738.57)
DRAM_D18: U3.AB9 U7.C2 | length 615.6
  Top Layer w4.7: v1(918.65,1098.13) 933.92,1113.88 U3.AB9@934.4,1113.88
  Signal Layer 1 w4.5: v1(862.13,707.07) 846.39,722.81 846.39,808.59 837.39,817.59 820.39,817.59 814.39,823.59 814.39,839.34 819.39,844.34 820.35,844.34 824.31,848.31 836.95,848.31 840.92,844.34 860.38,844.34 865.38,849.34 865.38,914.32 857.92,921.78 857.92,941.34 862.92,946.34 870.38,946.34 879.38,937.34 885.38,937.34 894.38,946.34 894.38,978.34 899.38,983.34 926.38,983.34 936.38,993.34 936.38,1003.34 931.38,1008.34 924.38,1008.34 919.38,1013.34 919.38,1044.33 903.4,1060.31 903.4,1072.95 908.78,1078.33 908.78,1088.26 v1(918.65,1098.13)
  Bottom Layer w4.7: v1(862.13,707.07) 877.79,722.73 877.88,722.82 877.94,722.76 U7.C2@877.94,722.58
DRAM_D19: U3.Y9 U7.A2 | length 608.1
  Top Layer w4.7: v1(918.65,1161.12) U3.Y9@934.4,1176.87
  Signal Layer 1 w4.5: v1(862.13,801.56) 862.13,817.33 867.13,822.33 885.38,822.33 890.38,827.33 890.38,866.34 895.38,871.34 912.38,871.34 917.38,866.34 917.38,827.33 922.38,822.33 936.38,822.33 941.38,827.33 941.38,945.34 947.38,951.34 951.01,951.34 963.48,963.81 963.48,993.91 965.39,995.82 965.39,1135.94 956.46,1144.87 942.75,1144.87 933.73,1153.89 925.88,1153.89 v1(918.65,1161.12)
  Bottom Layer w4.7: v1(862.13,801.56) 877.94,785.75 U7.A2@877.94,785.57
DRAM_D20: U3.Y7 U7.A7 | length 614
  Top Layer w4.7: v1(855.66,1161.12) U3.Y7@871.4,1176.87
  Signal Layer 1 w4.5: 726.05,811.64 v1(736.13,801.56) ; 726.05,811.66 719.38,818.32 719.38,862.66 724.64,867.91 744.13,867.91 748.38,872.16 748.38,878.16 744.13,882.41 724.64,882.41 720.39,886.66 720.39,898.75 750.63,928.99 750.63,969.09 736.13,983.59 736.13,991.09 740.38,995.34 750.16,995.34 754.41,999.58 754.41,1005.59 750.16,1009.84 740.38,1009.84 736.13,1014.08 736.13,1020.09 740.38,1024.34 750.16,1024.34 754.41,1028.58 754.41,1034.59 750.16,1038.84 740.38,1038.84 736.13,1043.08 736.13,1051.09 745.92,1060.88 745.92,1072.56 ; 745.93,1072.58 754.86,1081.51 755.7,1082.34 772.41,1082.34 777.41,1087.34 777.41,1106.4 785.38,1114.37 803.91,1114.37 808.91,1119.37 808.91,1138.87 815.91,1145.87 830.48,1145.87 845.73,1161.12 v1(855.66,1161.12)
  Bottom Layer w4.7: U7.A7@720.46,785.57 720.46,785.89 v1(736.13,801.56)
DRAM_D21: U3.Y8 U7.B8 | length 611.5
  Top Layer w4.7: v1(887.15,1161.12) U3.Y8@902.9,1176.87
  Signal Layer 1 w4.5: v1(673.14,738.57) 689.38,754.81 689.38,776.34 698.93,785.89 741.93,785.89 742.35,786.31 742.45,786.31 751.38,795.24 751.38,795.34 758.38,802.34 758.38,919.79 762.91,924.32 762.91,943.56 759.13,947.34 759.13,971.51 762.91,975.29 762.91,1038.97 768.91,1044.97 777.41,1053.49 777.41,1072.95 786.34,1081.88 798.98,1081.88 808.91,1091.81 808.91,1104.45 817.84,1113.38 829.42,1113.38 830.41,1114.37 830.48,1114.37 839.41,1123.3 839.41,1123.37 840.41,1124.37 840.41,1136.37 849.23,1145.19 871.22,1145.19 v1(887.15,1161.12)
  Bottom Layer w4.7: v1(673.14,738.57) 688.79,754.24 688.88,754.32 688.96,754.24 U7.B8@688.96,754.07
DRAM_D22: U3.AC8 U7.C3 | length 615.2
  Top Layer w4.7: v1(887.15,1066.63) U3.AC8@902.9,1082.38
  Signal Layer 1 w4.5: v1(830.63,770.06) 830.63,732.34 825.63,727.34 796.38,727.34 791.38,732.34 791.38,758.35 796.38,763.35 809.38,763.35 814.38,768.35 814.38,803.34 805.39,812.33 805.39,862.99 810.39,867.99 845.38,867.99 850.38,872.99 850.38,905.39 845.38,910.39 836.35,910.39 827.42,919.32 827.42,931.96 836.35,940.89 843.91,940.89 848.91,945.89 848.91,954.34 853.91,959.34 874.41,959.34 879.41,964.34 879.41,989.81 871.9,997.32 871.9,999.83 870.38,1001.35 870.38,1028.29 870.91,1028.82 870.91,1044.49 879.41,1052.99 879.41,1058.88 v1(887.15,1066.63)
  Bottom Layer w4.7: v1(830.63,770.06) 830.63,738.57 846.44,722.76 U7.C3@846.44,722.58
DRAM_D23: U3.AA9 U7.A3 | length 608.9
  Top Layer w4.7: v1(918.65,1129.62) U3.AA9@934.4,1145.37
  Signal Layer 1 w4.5: v1(830.63,833.06) 874.38,833.06 879.38,838.06 879.38,874.36 874.38,879.36 874.38,905.8 879.38,910.8 903.38,910.8 906.63,907.55 906.63,889.34 911.63,884.34 927.88,884.34 932.88,889.34 932.88,899.84 925.38,907.34 925.38,918.84 932.88,926.34 932.88,936.34 927.88,941.34 917.05,941.34 910.38,948.01 910.38,957.34 915.38,962.34 943.38,962.34 948.38,967.34 948.38,1013.34 934.89,1026.83 934.89,1041.46 940.38,1046.95 940.38,1054.34 934.89,1059.83 934.89,1072.95 940.38,1078.44 940.38,1085.26 933.9,1091.74 933.9,1101.97 934.89,1102.96 934.89,1104.45 940.38,1109.94 940.38,1117.33 934.89,1122.82 934.89,1124.62 929.89,1129.62 v1(918.65,1129.62)
  Bottom Layer w4.7: v1(830.63,833.06) 846.38,817.31 846.38,785.81 846.44,785.75 U7.A3@846.44,785.57
DRAM_D24: U3.AE9 U7.E3 | length 851.1
  Top Layer w4.7: U3.AE9@934.4,1019.39 934.4,963.42 v1(959.53,938.29)
  Signal Layer 2 w4.5: v1(799.14,644.08) 789.38,634.34 774.38,634.34 757.38,617.34 757.38,605.34 762.38,600.34 795.14,600.34 804.14,609.34 841.88,609.34 846.88,614.34 846.88,618.9 856.57,628.59 931.39,628.59 948.39,611.59 967.6,611.59 997.88,641.87 997.88,765.84 993.38,770.34 993.38,902.34 1013.38,922.34 1013.38,936.34 1005.38,944.34 991.38,944.34 985.33,938.29 v1(959.53,938.29)
  Bottom Layer w4.7: v1(799.14,644.08) 814.88,659.83 842.38,659.83 842.63,659.58 U7.E3@846.44,659.59
DRAM_D25: U3.Y10 U7.F8 | length 850.4
  Top Layer w4.7: v1(950.14,1161.12) U3.Y10@965.89,1176.87
  Signal Layer 2 w4.5: v1(704.63,644.08) 720.14,659.59 773.39,659.59 787.39,673.59 808.39,673.59 822.65,659.33 836.95,659.33 837.04,659.24 846.88,669.08 846.88,685.08 852.62,690.83 898.95,690.83 909.39,701.27 909.39,745.59 918.39,754.59 932.39,754.59 940.89,763.09 940.89,862.91 913.67,890.12 897.7,906.09 892.65,906.09 882.38,916.36 882.38,974.34 916.38,1008.34 916.38,1041.34 903.4,1054.32 903.4,1107.34 909.43,1113.38 924.42,1113.38 934.89,1123.85 934.89,1145.1 950.14,1160.35 v1(950.14,1161.12)
  Bottom Layer w4.7: U7.F8@688.96,628.09 688.96,628.25 688.88,628.33 v1(704.63,644.08)
DRAM_D26: U3.AE11 U7.H3 | length 848.6
  Top Layer w4.7: v1(986.03,965.69) 986.03,966.99 997.39,978.35 U3.AE11@997.39,1019.39
  Signal Layer 2 w4.5: v1(799.14,584.09) 811.64,596.59 941.39,596.59 946.39,601.59 969.63,601.59 1006.38,638.34 1006.38,773.34 1002.38,777.34 1002.38,892.34 1015.38,905.34 1050.38,905.34 1062.38,917.34 1062.38,991.34 1050.38,1003.34 1009.38,1003.34 1000.38,994.34 1000.38,980.04 v1(986.03,965.69)
  Bottom Layer w4.7: v1(799.14,584.09) 805.63,584.09 824.38,565.34 835.38,565.34 835.63,565.09 U7.H3@846.44,565.1
DRAM_D27: U3.AB11 U7.G2 | length 842.8
  Top Layer w4.7: v1(981.64,1098.13) U3.AB11@997.39,1113.88
  Signal Layer 1 w4.5: v1(862.13,612.58) 871.38,612.58 878.89,620.09 887.41,628.59 904.87,628.59 909.87,633.59 909.87,652.04 917.16,659.33 919.13,659.33 919.39,659.59 935.63,659.59 940.39,664.35 940.39,675.09 v1(956.62,691.32)
  Signal Layer 2 w4.5: v1(956.62,691.32) 971.87,706.57 971.87,741.85 967.38,746.34 967.38,880.17 923.18,924.37 923.18,936.75 918.18,941.75 916.64,941.75 909.38,949.01 909.38,966.6 914.38,971.6 919.67,971.6 936.88,988.81 946.06,998.02 951.06,998.02 971.38,1018.34 971.38,1046.34 966.38,1051.34 943.86,1051.34 934.89,1060.31 934.89,1104.45 944.81,1114.37 956.46,1114.37 965.39,1123.3 965.39,1140.87 970.39,1145.87 992.38,1145.87 997.38,1140.87 997.38,1103.13 992.38,1098.13 v1(981.64,1098.13)
  Bottom Layer w4.7: v1(862.13,612.58) 877.94,596.77 U7.G2@877.94,596.59
DRAM_D28: U3.AC9 U7.F7 | length 847
  Top Layer w4.7: v1(918.65,1066.63) U3.AC9@934.4,1082.38
  Signal Layer 2 w4.5: v1(736.13,644.08) 725.88,644.08 720.9,639.1 720.9,605.34 725.9,600.34 734.39,600.34 739.39,605.34 739.39,623.59 743.39,627.59 752.39,627.59 756.97,632.17 756.97,646.34 759.45,648.83 779.63,648.83 791.39,660.59 804.39,660.59 815.38,649.6 815.38,635.6 822.89,628.09 838.89,628.09 846.88,636.08 846.88,652.08 854.39,659.59 901.39,659.59 909.39,667.59 909.39,681.41 918.8,690.83 934.62,690.83 941.39,697.59 941.39,716.48 ; v1(918.65,1066.63) 918.65,1052.33 928.38,1042.6 928.38,1000.34 892.68,964.64 892.68,919.76 892.86,919.59 897.86,914.59 901.24,914.59 949.39,866.44 949.39,754.59 941.37,746.57 941.37,716.5
  Bottom Layer w4.7: U7.F7@720.46,628.09 720.46,628.25 720.38,628.33 v1(736.13,644.08)
DRAM_D29: U3.AD9 U7.F2 | length 848
  Top Layer w4.7: v1(907.93,928.89) 907.93,929.89 917.25,939.21 917.25,1011.46 918.65,1012.86 918.65,1035.41 934.12,1050.88 U3.AD9@934.4,1050.88
  Signal Layer 1 w4.5: 878.37,732.25 878.37,744.89 ; 878.37,763.75 878.37,776.38 ; 878.38,732.24 878.38,730.66 886.7,722.34 903.12,722.34 909.14,716.32 909.14,663.34 893.62,647.83 v1(893.62,644.08) ; 878.38,744.89 878.38,763.74 ; 878.38,776.39 878.38,779.34 885.35,786.31 937.38,786.31 940.37,789.3 940.37,805.34 945.37,810.34 967.38,810.34 972.38,805.34 972.38,778.34 967.38,773.34 913.38,773.34 908.87,768.83 908.87,758.85 913.38,754.34 951.62,754.34 956.62,749.34 v1(956.62,722.82)
  Signal Layer 2 w4.5: v1(907.93,928.89) 907.93,924.79 957.89,874.83 957.89,740.35 956.62,739.08 v1(956.62,722.82)
  Bottom Layer w4.7: U7.F2@877.94,628.09 877.94,628.27 877.88,628.33 v1(893.62,644.08)
DRAM_D30: U3.AD11 U7.H7 | length 850.2
  Top Layer w4.7: v1(978.73,987.59) 978.73,1002.79 983.04,1007.1 983.04,1011.46 981.64,1012.86 981.64,1035.14 U3.AD11@997.39,1050.88
  Signal Layer 1 w4.5: v1(746.38,558.34) 756.38,568.34 756.38,594.59 761.38,599.59 806.18,599.59 815.38,590.39 815.38,572.58 822.13,565.84 839.12,565.84 843.37,561.59 843.37,559.59 847.62,555.34 853.62,555.34 857.87,559.59 857.87,561.59 862.12,565.84 868.12,565.84 872.37,561.59 872.37,552.59 876.62,548.34 882.62,548.34 886.87,552.59 886.87,561.59 891.12,565.84 900.62,565.84 909.37,574.59 909.37,589.59 916.37,596.59 931.37,596.59 940.25,605.47 940.25,606.14 940.37,606.27 940.37,612.1 v1(956.6,628.33)
  Signal Layer 2 w4.5: v1(956.6,628.33) 956.6,628.56 989.38,661.34 989.38,756.34 984.88,760.84 984.88,887.84 941.98,930.74 941.98,950.84 v1(978.73,987.59)
  Bottom Layer w4.7: U7.H7@720.46,565.1 727.21,558.34 v1(746.38,558.34)
DRAM_D31: U3.AC11 U7.H8 | length 846.8
  Top Layer w4.7: v1(981.64,1066.63) U3.AC11@997.39,1082.38
  Signal Layer 1 w4.5: v1(673.28,580.74) 673.78,580.74 690.13,597.09 715.13,597.09 735.93,617.89 824.28,617.89 844.84,597.33 899.94,597.33 909.85,607.25 909.85,618.9 918.79,627.83 932.61,627.83 941.37,636.59 941.37,645.33 955.87,659.83 v1(956.6,659.83)
  Signal Layer 2 w4.5: v1(956.6,659.83) 980.88,684.11 980.88,749.84 976.38,754.34 976.38,883.2 932.83,926.75 932.83,963.84 954.58,985.59 955.16,985.59 981.64,1012.07 v1(981.64,1066.63)
  Bottom Layer w4.7: v1(673.28,580.74) 684.43,569.59 U7.H8@688.96,565.1
DRAM_D32: U3.AA17 U10.E3 | length 925.7
  Top Layer w4.7: U3.AA17@1186.36,1145.37 v1(1202.11,1129.62) ; U10.E3@1287.38,659.59 1318.88,659.58 v1(1334.63,643.83)
  Signal Layer 2 w4.5: v1(1202.11,1129.62) 1202.11,1116.07 1186.38,1100.34 1186.38,1019.88 1182.13,1015.64 1172.63,1015.64 1168.38,1011.39 1168.38,1005.38 1172.63,1001.14 1182.13,1001.14 1186.38,996.89 1186.38,990.88 1182.13,986.64 1172.63,986.64 1168.38,982.39 1168.38,976.38 1172.63,972.14 1182.13,972.14 1186.38,967.89 1186.38,888.34 1134.38,836.34 1134.38,647.34 1170.38,611.34 1185.38,611.34 1202.38,628.34 1279.38,628.34 1301.38,606.34 1342.38,606.34 1351.38,615.34 1351.38,627.08 v1(1334.63,643.83)
DRAM_D33: U3.AA18 U10.G2 | length 930.2
  Top Layer w4.7: U3.AA18@1217.86,1145.37 v1(1233.61,1129.62) ; U10.G2@1255.88,596.59 v1(1271.64,612.33)
  Signal Layer 1 w4.5: v1(1177.15,691.07) 1188.64,702.56 1188.64,712.49 1198.22,722.07 1214.97,722.07 1223.9,713.14 1223.9,697.34 1217.13,690.57 1202.33,690.57 1193.4,681.64 1193.4,669.01 1203.32,659.08 1214.97,659.08 1223.9,650.15 1223.9,637.82 1234.14,627.58 1246.46,627.58 1255.39,618.65 1255.39,617.33 1260.39,612.33 v1(1271.64,612.33)
  Signal Layer 2 w4.5: v1(1177.15,691.07) 1166.9,691.07 1161.9,696.07 1161.9,821.86 1212.88,872.84 1212.88,884.98 1217.13,889.23 1229.13,889.23 1233.38,893.48 1233.38,899.48 1229.13,903.73 1217.13,903.73 1212.88,907.98 1212.88,913.98 1217.13,918.23 1233.13,918.23 1236.86,921.95 1236.86,929.01 1233.13,932.73 1217.13,932.73 1212.88,936.98 1212.88,942.98 1217.13,947.23 1233.13,947.23 1236.86,950.95 1236.86,958.01 1233.13,961.73 1217.13,961.73 1212.88,965.98 1212.88,977.84 1220.38,985.34 1240.38,985.34 1249.38,994.34 1249.38,1005.18 1254.38,1010.18 1254.38,1023.18 1249.38,1028.18 1249.38,1041.18 1254.38,1046.18 1254.38,1053.34 1249.38,1058.34 1249.38,1072.43 1238.93,1082.88 1227.29,1082.88 1218.36,1091.81 1218.36,1104.45 1227.29,1113.38 1227.42,1113.38 1233.61,1119.57 v1(1233.61,1129.62)
DRAM_D34: U3.AC18 U10.H8 | length 925.1
  Top Layer w4.7: U3.AC18@1217.86,1082.38 v1(1233.61,1066.63) ; v1(1429.12,580.84) U10.H8@1444.86,565.1
  Signal Layer 1 w4.5: v1(1177.15,659.58) 1192.38,644.35 1192.38,638.34 1203.14,627.58 1214.97,627.58 1223.9,618.65 1223.9,601.84 1229.66,596.09 1277.96,596.09 1279.7,594.34 1289.64,594.34 1294.64,599.34 1294.64,615.34 1298.38,619.08 1410.13,619.08 1413.87,615.34 1413.87,602.34 1419.13,597.08 1440.63,597.08 1445.37,592.34 1445.37,585.84 1440.37,580.84 v1(1429.12,580.84)
  Signal Layer 2 w4.5: v1(1177.15,659.58) 1160.38,659.58 1153.4,666.55 1153.4,828.36 1204.38,879.34 1204.38,995.23 1208.88,999.73 1229.38,999.73 1234.38,1004.73 1234.38,1012.73 1229.38,1017.73 1208.88,1017.73 1204.38,1022.23 1204.38,1029.34 1233.61,1058.57 v1(1233.61,1066.63)
DRAM_D35: U3.AE19 U10.F2 | length 927.9
  Top Layer w4.7: v1(1240.14,643.83) U10.F2@1255.88,628.09 ; v1(1249.36,971.32) 1244.83,975.84 1244.83,1014.86 U3.AE19@1249.36,1019.39
  Signal Layer 1 w4.5: v1(1177.15,722.57) 1174.38,722.57 1170.38,726.57 1170.38,743.03 1174.38,747.03 1188.88,747.03 1193.38,751.53 1193.38,760.53 1188.88,765.03 1174.38,765.03 1170.38,769.03 1170.38,779.03 1174.38,783.03 1188.88,783.03 1193.38,787.53 1193.38,796.53 1188.88,801.03 1181.65,801.03 1177.15,805.53 1177.15,814.56 1186.05,823.46 1192.38,823.46 1198.26,817.58 1204.63,817.58 1210.99,823.95 1210.99,830.31 1205.11,836.19 1205.11,842.52 1212.43,849.84 1231.86,849.84 1250.39,831.3 1250.39,822.34 1245.39,817.34 1234.61,817.34 1224.89,807.63 1224.89,790.55 1230.38,785.06 1251.38,785.06 1256.38,780.06 1256.38,759.34 1251.38,754.34 1229.38,754.34 1224.38,749.34 1224.38,728.07 1229.38,723.07 1250.39,723.07 1255.39,718.07 1255.39,700.5 1249.38,694.49 1249.38,687.66 1255.39,681.64 1255.39,669.01 1246.46,660.07 1245.14,660.07 1240.14,655.07 v1(1240.14,643.83)
  Signal Layer 2 w4.5: v1(1177.15,722.57) 1175.88,723.84 1175.88,822.84 1249.36,896.32 v1(1249.36,971.32)
DRAM_D36: U3.Y17 U10.H3 | length 924.5
  Top Layer w4.7: U3.Y17@1186.36,1176.87 v1(1202.11,1161.12) ; U10.H3@1287.38,565.1 1315.88,565.09 v1(1334.63,583.84)
  Signal Layer 2 w4.5: 1176.37,1114.34 1164.38,1114.34 1155.04,1105 1155.04,1055 1123.38,1023.34 1123.38,992.32 1123.63,992.07 1123.63,970.4 1127.88,966.15 1138.13,966.15 1142.38,961.9 1142.38,955.9 1138.13,951.65 1127.88,951.65 1123.63,947.4 1123.63,941.4 1127.88,937.15 1138.13,937.15 1142.38,932.9 1142.38,926.9 1138.13,922.65 1127.88,922.65 1125.38,920.15 1125.38,641.34 1165.38,601.34 1187.38,601.34 1192.38,596.34 1322.13,596.34 v1(1334.63,583.84) ; 1176.4,1114.37 1176.94,1114.37 1185.87,1123.3 1185.87,1123.83 1186.86,1124.82 1186.86,1145.87 v1(1202.11,1161.12)
DRAM_D37: U3.Y18 U10.H7 | length 927.5
  Top Layer w4.5: v1(1358.38,595.33) 1370.09,595.33 1382.43,583 1382.43,574.42
  Top Layer w4.7: U3.Y18@1217.86,1176.87 v1(1233.61,1161.12) ; 1382.59,574.27 1391.76,565.1 U10.H7@1413.36,565.1
  Signal Layer 1 w4.5: v1(1177.15,628.08) 1177.15,621.57 1202.63,596.09 1214.97,596.09 1223.9,587.15 1223.9,574.82 1233.13,565.59 1309.63,565.59 1319.38,575.34 1319.38,590.15 1328.31,599.09 1354.63,599.09 v1(1358.38,595.33)
  Signal Layer 2 w4.5: v1(1177.15,628.08) 1144.9,660.33 1144.9,832.86 1195.88,883.84 1195.88,1035.86 1217.38,1057.36 1217.38,1071.52 ; 1208.38,1081.88 1208.38,1108.34 1218.36,1118.32 1218.36,1135.94 ; 1208.43,1081.88 1217.36,1072.95 1217.36,1071.54 ; 1218.38,1135.96 1218.38,1145.89 v1(1233.61,1161.12)
DRAM_D38: U3.AB19 U10.F8 | length 930.4
  Top Layer w4.7: U3.AB19@1249.36,1113.88 v1(1265.1,1098.13) ; v1(1429.12,643.83) U10.F8@1444.86,628.09
  Signal Layer 2 w4.5: v1(1265.1,1098.13) 1265.1,1108.34 1270.1,1113.34 1276.38,1113.34 1281.38,1108.34 1281.38,1104.48 1281.35,1104.44 1281.35,1091.81 ; 1281.35,1060.31 1281.35,1072.95 ; 1281.38,1060.28 1281.38,1050.34 1273.6,1042.56 1273.6,891.56 1192.88,810.84 1192.88,762.84 1201.38,754.34 1219.38,754.34 1224.38,749.34 1224.38,731.34 1233.65,722.07 1248.38,722.07 1255.39,715.06 1255.39,695.57 1260.39,690.57 1281.15,690.57 1286.89,684.83 1286.89,668.83 1296.64,659.08 1308.46,659.08 1318.39,669.01 1318.39,676.34 1323.39,681.34 1338.86,681.34 1347.36,672.84 1355.88,672.84 1368.65,660.07 1435.43,660.07 1445.37,670.01 1445.37,681.64 1454.3,690.57 1466.93,690.57 1476.38,681.13 1476.38,669.52 1465.94,659.08 1454.3,659.08 1439.05,643.83 v1(1429.12,643.83) ; 1281.38,1072.98 1281.38,1091.78